# Altium PCB NB-Fi-Router.PcbDoc
Units mm, origin at the board's own origin, x right, y up, seen from the top; angles counter-clockwise.
Board outline 39 x 72 mm, 2 copper layers (Top Layer, Bottom Layer); 58 components, 51 nets, 236 pads, 135 vias.
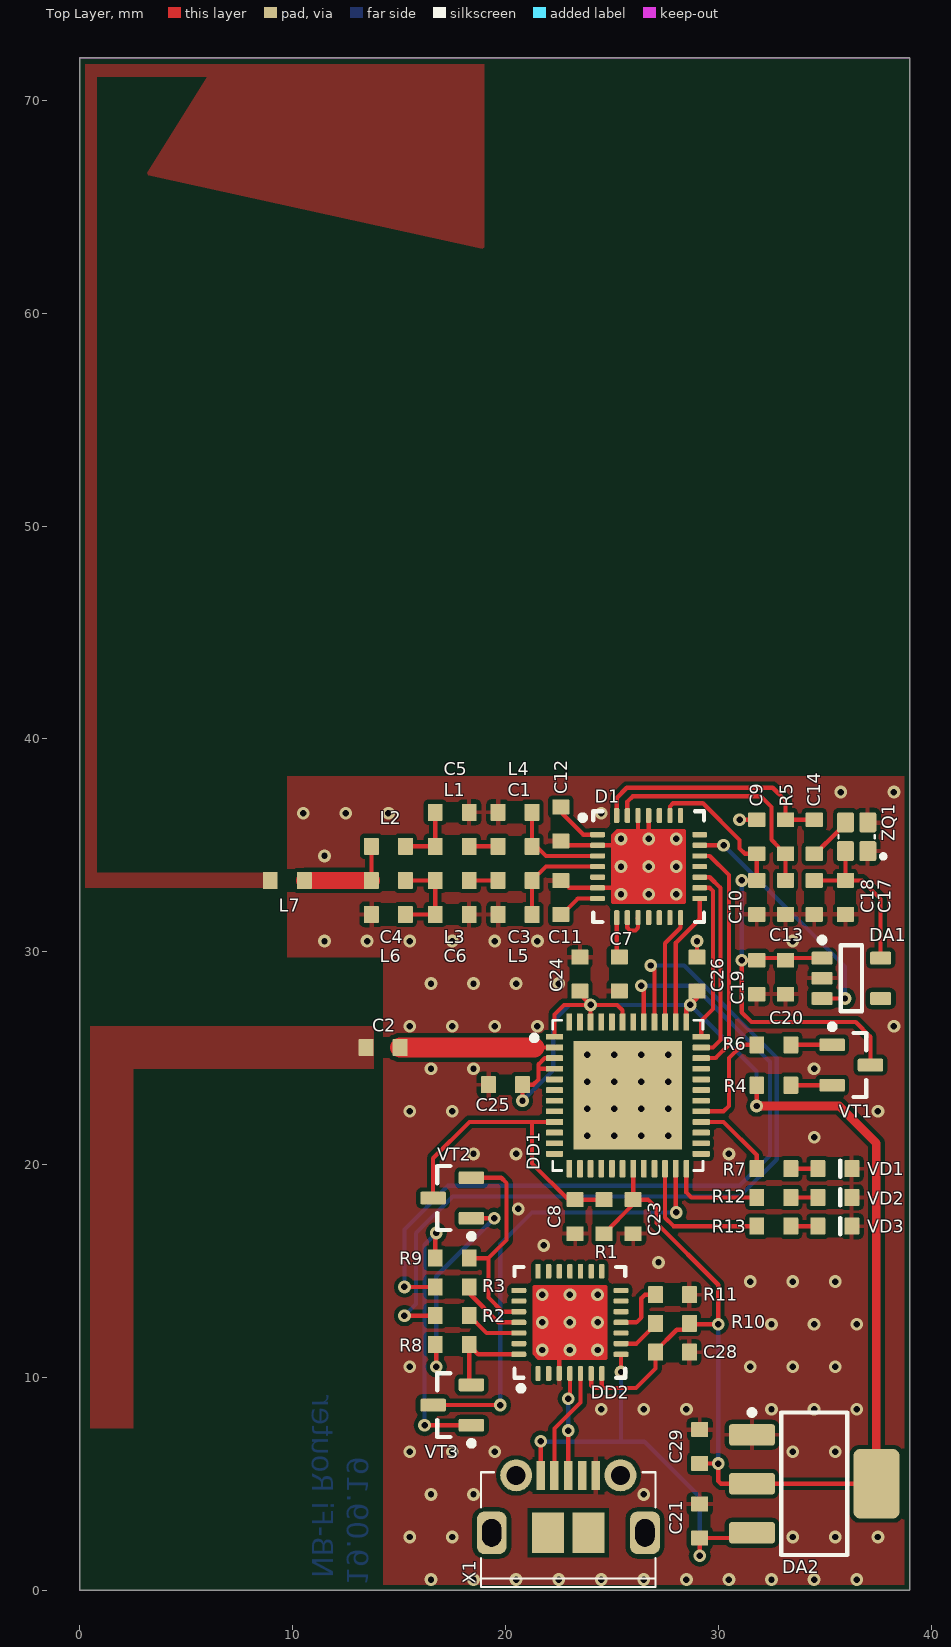
[diagram p0: Top Layer view]
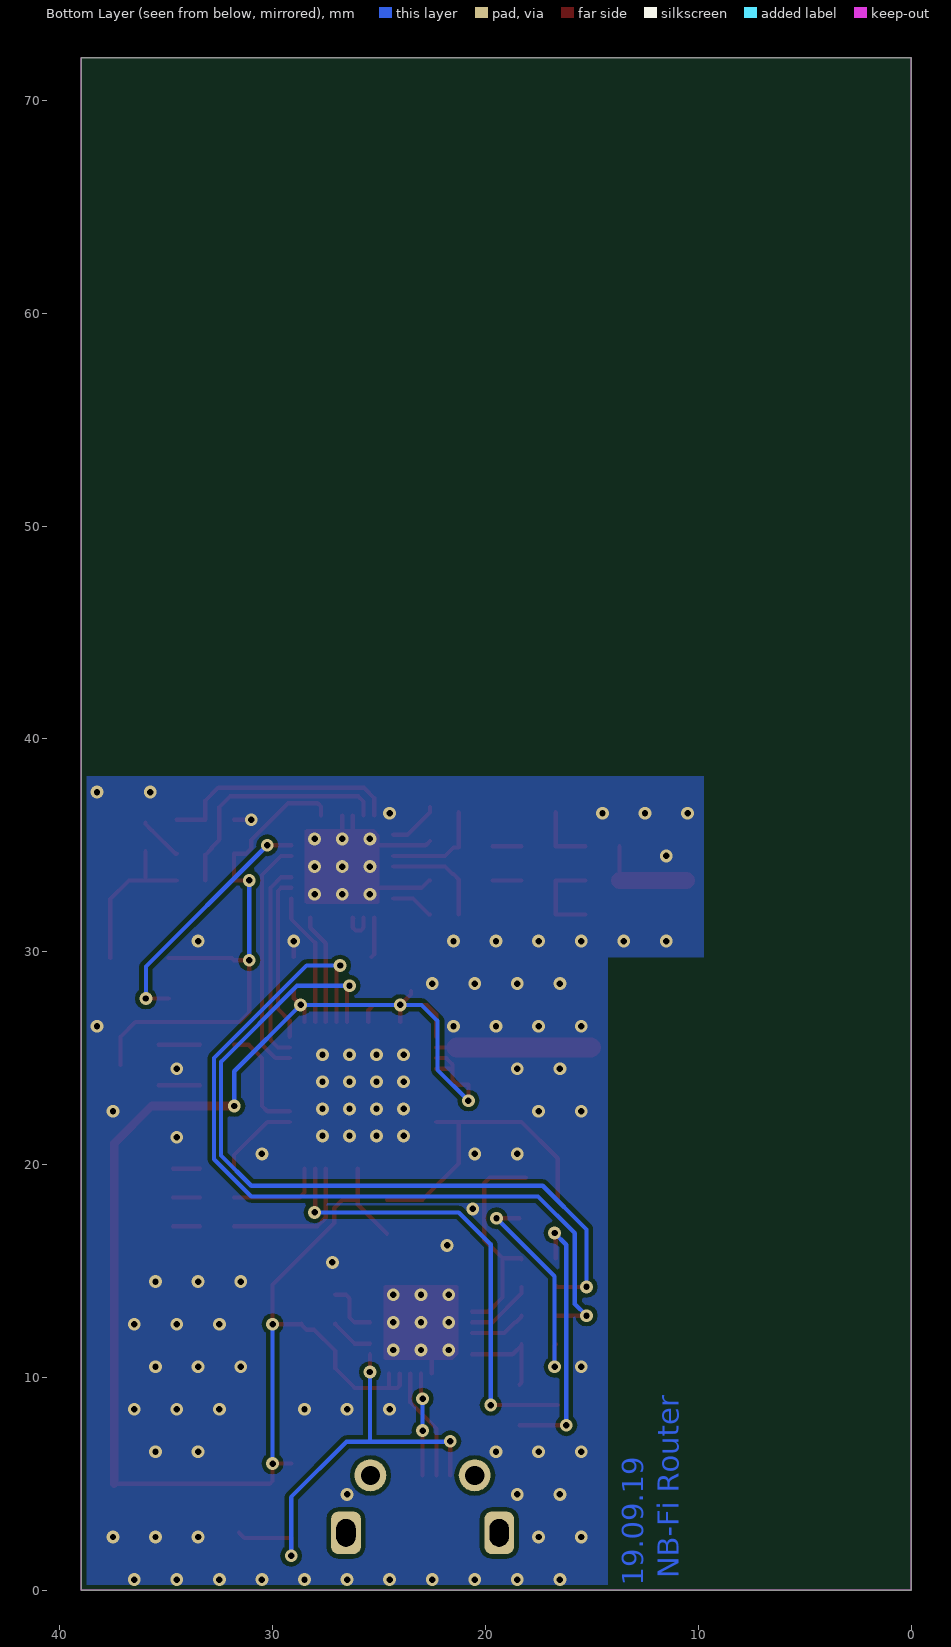
[diagram p1: Bottom Layer view, seen from below]
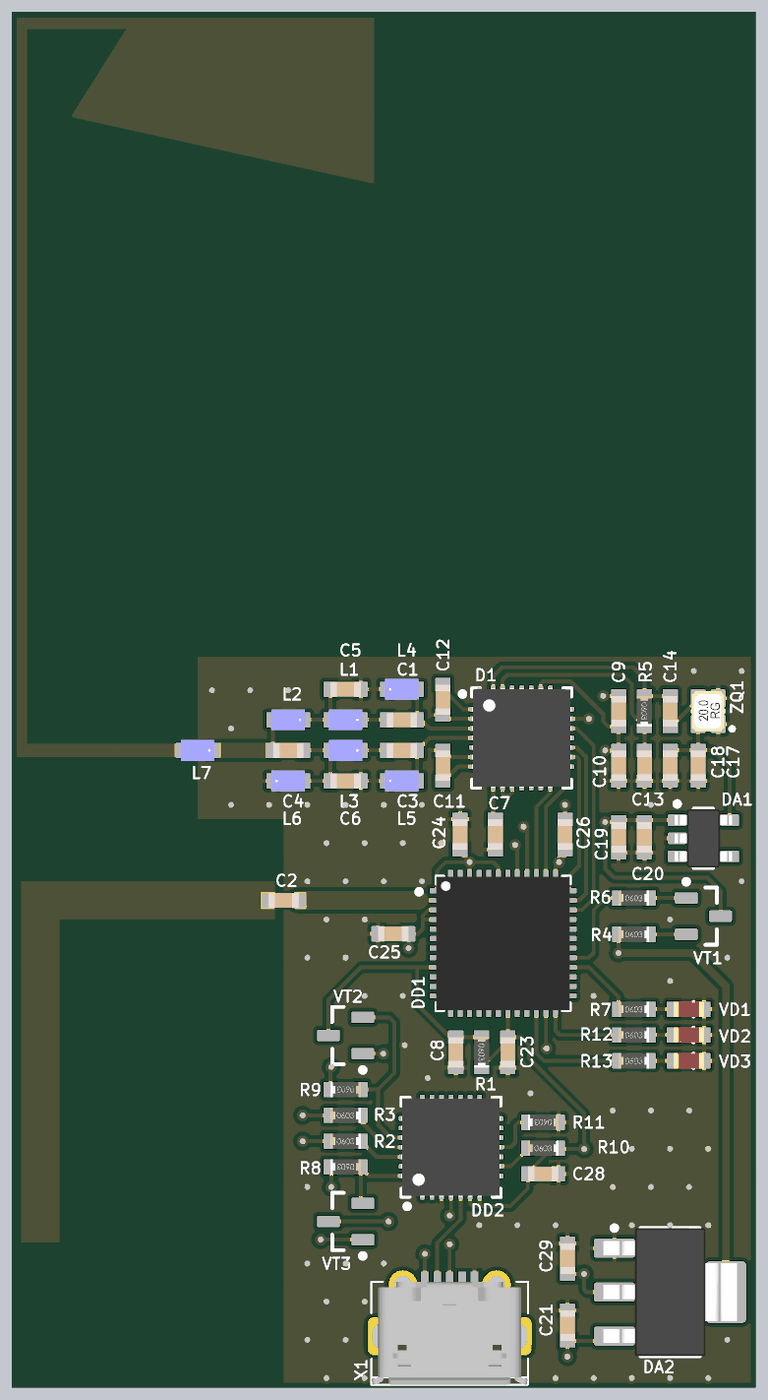
[diagram p2: 3D render of the assembled board from above, using the file's embedded part models]

## Layer stack, top to bottom
Top Solder: solder mask 0.0102, Solder Resist, Dk 3.5
Top Layer: signal copper 0.0356
Dielectric 1: dielectric 0.32, FR-4, Dk 4.8
Bottom Layer: signal copper 0.0356
Bottom Solder: solder mask 0.0102, Solder Resist, Dk 3.5

## Board outline
0,0 0,72 39,72 39,0

## Design rules (kind name [scope] priority, off if disabled: settings)
Clearance Clearance_SolderBridge [InComponent('SB1')] p1: gap=0.125 ignorepadtopadclearanceinfootprint=TRUE except(3: SMDPad-Fill SMDPad-Poly THPad-Fill THPad-Poly THPad-Region Via-Fill Via-Poly Via-Region Fill-Fill Fill-Poly Fill-Region Poly-Poly Poly-Region)
Clearance Clearance_Bat+ [InComponent('GB1')] p2: gap=0.125 ignorepadtopadclearanceinfootprint=TRUE except(3: Arc-Fill Arc-Poly Arc-Region Track-Fill Track-Poly Track-Region SMDPad-Fill SMDPad-Poly SMDPad-Region THPad-Fill THPad-Poly THPad-Region Via-Fill Via-Poly Via-Region Fill-Fill Fill-Poly Fill-Region Poly-Poly Poly-Region Region-Region)
Clearance Keepout [IsKeepOut] p3: gap=0.125 ignorepadtopadclearanceinfootprint=FALSE except(0.25: Arc-Fill Arc-Poly Arc-Region Track-Fill Track-Poly Track-Region SMDPad-Fill SMDPad-Poly SMDPad-Region THPad-Fill THPad-Poly THPad-Region Via-Fill Via-Poly Via-Region Fill-Fill Fill-Poly Fill-Region Poly-Poly Poly-Region Region-Region)
Clearance [All] p4: gap=0.125 ignorepadtopadclearanceinfootprint=FALSE except(0.2: Arc-Fill Arc-Poly Arc-Region Track-Fill Track-Poly Track-Region SMDPad-Fill SMDPad-Poly SMDPad-Region THPad-Fill THPad-Poly THPad-Region Via-Fill Via-Poly Via-Region Fill-Fill Fill-Poly Fill-Region Poly-Poly Poly-Region Region-Region)
ComponentClearance [All] p1: gap=0.2 collisioncheckmode=3 verticalgap=0.2 showdistances=FALSE
DiffPairsRouting [All] p1: maxlimit=0.254 minlimit=0.254 mostfreqgap=0.254 toplayer_minwidth=0.25 toplayer_maxwidth=0.381 toplayer_prefwidth=0.381 bottomlayer_minwidth=0.25 bottomlayer_maxwidth=0.381 bottomlayer_prefwidth=0.381 maxuncoupledlength=12.7
Height [All] p1: minheight=0 maxheight=35 prefheight=12.7
HoleSize [All] p1: absolutevalues=TRUE maxlimit=5 minlimit=0.3 maxpercent=80.000 minpercent=20.000
MinimumSolderMaskSliver [All] p1: minsoldermaskwidth=0.1
PolygonConnect PolygonConnectDirect [All vs InNet('ANT_PCB_2400') or InNet('ANT_PCB_868')] p1: connectstyle=Direct reliefconductorwidth=0.25 reliefentries=4 polygonreliefangle="90 Angle" airgapwidth=0.25
PolygonConnect PolygonConnectRelief [All] p2: thpad.connectstyle=Relief thpad.reliefconductorwidth=0.2 thpad.reliefentries=4 thpad.polygonreliefangle="90 Angle" thpad.airgapwidth=0.2 smdpad.connectstyle=Relief smdpad.reliefconductorwidth=0.2 smdpad.reliefentries=4 smdpad.polygonreliefangle="90 Angle" smdpad.airgapwidth=0.2 via.connectstyle=Direct via.reliefconductorwidth=0.254 via.reliefentries=4 via.polygonreliefangle="90 Angle" via.airgapwidth=0.254
RoutingVias [All] p1: holewidth=0.3 width=0.6 viastyle="Through Hole" minholewidth=0.3 minwidth=0.6 maxholewidth=0.4 maxwidth=0.8
SilkToSilkClearance [All] p1: silktosilkclearance=0.01
SilkToSolderMaskClearance [IsPad] p1: minsilkscreentomaskgap=0.01 clearancetoexposedcopper=TRUE
SolderMaskExpansion [All] p1: expansion=0.05
Width [All] p1: maxlimit=3 minlimit=0.125 preferedwidth=0.2 minimp=50.000000 maximp=50.000000 favimp=50.000000
23 further rules are at their usual default settings.

## Components (designator, comment, footprint, x,y, rotation, side; value= is the part's Value field where it differs from the comment)
C1 "2.7p 50V" C0603 20.452,34.95 r180 top
C2 "1.3p 50V" C0603 14.25,25.5 r180 top
C3 "2.7p 50V" C0603 20.452,33.35 r180 top
C4 "2.7p 50V" C0603 14.5,33.35 r180 top
C5 "6.2p 50V" C0603 17.5,36.55 r180 top
C6 "3.6p 50V" C0603 17.5,31.75 r180 top
C7 "39p 50V" C0603 25.35,28.95 r270 top
C8 "0.1u 16V" C0603 23.275,17.55 r90 top
C9 "0.1u 16V" C0603 31.807,35.4 r270 top
C10 "4.7u 10V" C0603 31.807,32.55 r90 top
C11 "0.1u 16V" C0603 22.602,32.55 r270 top
C12 "0.1u 16V" C0603 22.602,36 r90 top
C13 "1000p 50V" C0603 33.157,32.55 r270 top
C14 "1000p 50V" C0603 34.508,35.4 r270 top
C17 "0.1u 16V" C0603 35.976,32.55 r90 top
C18 "1000p 50V" C0603 34.508,32.55 r270 top
C19 "1000p 50V" C0603 31.807,28.8 r270 top
C20 "1u 16V" C0603 33.157,28.8 r90 top
C21 "4.7u 10V" C0603 29.127,3.25 r270 top
C23 "0.01u 50V" C0603 26,17.55 r90 top
C24 "4.7u 10V" C0603 23.5,28.95 r270 top
C25 "0.1u 16V" C0603 20,23.75 r0 top
C26 "0.1u 16V" C0603 29,28.95 r270 top
C28 "0.1u 16V" C0603 27.85,11.184 r180 top
C29 "4.7u 10V" C0603 29.127,6.75 r270 top
D1 "AX5043-1-TA05" QFN28 26.727,34 r0 top locked
DA1 "AP2127K-1.8TRG1" SOT23-5 36.25,28.75 r270 top
DA2 "AMS1117-3.3" SOT223-4 34.508,5 r270 top
DD1 "ESP32-PICO-D4" QFN48-7x7 25.75,23.25 r0 top locked
DD2 "CP2102-GMR" QFN28 23.027,12.584 r90 top
L1 "18nH" L0603_LQW 17.5,34.95 r180 top
L2 "12nH" L0603_LQW 14.5,34.95 r180 top
L3 "18nH" L0603_LQW 17.5,33.35 r180 top
L4 "18nH" L0603_LQW 20.452,36.55 r0 top
L5 "18nH" L0603_LQW 20.452,31.75 r0 top
L6 "12nH" L0603_LQW 14.5,31.75 r0 top
L7 "9.1nH" L0603_LQW 9.75,33.35 r180 top
R1 "10k 1%" R0603 24.625,17.55 r270 top
R2 "1k 1%" R0603 17.5,12.9 r0 top
R3 "1k 1%" R0603 17.5,14.251 r0 top
R4 "1R 1%" R0603 32.607,23.725 r0 top
R5 "1k 1%" R0603 33.157,35.4 r270 top
R6 "1k 1%" R0603 32.607,25.625 r0 top
R7 "200R 1%" R0603 32.607,19.805 r0 top
R8 "10k 1%" R0603 17.5,11.55 r180 top
R9 "10k 1%" R0603 17.5,15.601 r180 top
R10 "10k 1%" R0603 27.85,12.534 r0 top
R11 "10k 1%" R0603 27.85,13.884 r180 top
R12 "200R 1%" R0603 32.607,18.455 r0 top
R13 "200R 1%" R0603 32.607,17.105 r0 top
VD1 "RED" LED0603_RED 35.476,19.805 r0 top
VD2 "RED" LED0603_RED 35.476,18.455 r0 top
VD3 "RED" LED0603_RED 35.476,17.105 r0 top
VT1 "IRLML2246TRPBF" SOT23-3L 36.25,24.675 r270 top
VT2 "BC847BLT1G" SOT23-3L 17.5,18.426 r90 top
VT3 "BC847BLT1G" SOT23-3L 17.5,8.697 r90 top
X1 "1050170001" 1050170001 22.953,0.144 r0 top
ZQ1 "26MHz 2ppm" QSMD2.0x1.6x0.7 36.5,35.4 r90 top

## Footprints (in the part's own frame and the unit in brackets; to place one, negate y for a bottom-side part, rotate by r counter-clockwise, add the part's x,y. Pads: shape width x height; smd on the part's side, far side on the other; paste and mask are expansions set on the pad)
1050170001 [mm] "http://www.molex.com/pdm_docs/sd/1050170001_sd.pdf"
  rect 0.4x1.35 smd: 1(-1.3,5.25) 2(-0.65,5.25) 3(0,5.25) 4(0.65,5.25) 5(1.3,5.25)
  round 1.5 hole 0.9: 6(2.45,5.25) 11(-2.45,5.25)
  rrect50% 1.4x2 hole 0.9 slot 1.3 at 90 deg: 7(3.6,2.55) 10(-3.6,2.55)
  rect 1.5x1.9 smd: 8(0.95,2.55) 9(-0.95,2.55)
  silkscreen extent -4.1,0 4.1,5.4, body extent -4.3,0 4.1,7.62, height 7.1
C0603 [mm] "Chip Capacitor 0603"
  rrect10% 0.7x0.8 smd: 1(-0.8,0) 2(0.8,0)
  Top Layer pour cut-out: -0.4,0.5 0.4,0.5 0.4,-0.5 -0.4,-0.5
  body extent -0.8,-0.4 0.8,0.4, height 0.8
L0603_LQW [mm] "Chip Inductor 0603"
  rrect10% 0.7x0.8 smd: 1(-0.8,0) 2(0.8,0)
  Top Layer pour cut-out: -0.35,0.55 0.35,0.55 0.35,-0.55 -0.35,-0.55
  body extent -0.87,-0.54 0.88,0.55, height 0.93
LED0603_RED [mm]
  rrect10% 0.7x0.8 smd mask+0.075: 1(-0.8,0) 2(0.8,0)
  Top Layer pour cut-out: -0.35,0.55 0.35,0.55 0.35,-0.55 -0.35,-0.55
  silkscreen extent 0.25,-0.38 0.25,0.38, body extent -0.8,-0.4 0.8,0.4, height 0.39
QFN28 [mm] "QFN, 28-Leads, Body 5,00x5,00mm, Pitch 0,50mm, Thermal Pad 3,13x3,13mm, IPC Medium Density"
  rrect50% 0.7x0.25 smd: 1(-2.4,1.5) 2(-2.4,1) 3(-2.4,0.5) 4(-2.4,0) 5(-2.4,-0.5) 6(-2.4,-1) 7(-2.4,-1.5) 15(2.4,-1.5) 16(2.4,-1) 17(2.4,-0.5) 18(2.4,0) 19(2.4,0.5) 20(2.4,1) 21(2.4,1.5)
  rrect50% 0.25x0.7 smd: 8(-1.5,-2.4) 9(-1,-2.4) 10(-0.5,-2.4) 11(0,-2.4) 12(0.5,-2.4) 13(1,-2.4) 14(1.5,-2.4) 22(1.5,2.4) 23(1,2.4) 24(0.5,2.4) 25(0,2.4) 26(-0.5,2.4) 27(-1,2.4) 28(-1.5,2.4)
  round 0.6 hole 0.3: 29(0,0)
  Top Layer pour cut-out: -1.875,1.875 -1.875,-1.875 1.875,-1.875 1.875,1.875
  Top Layer region: -1.75,1.5 -1.5,1.75 1.7,1.75 1.75,1.7 1.75,-1.7 1.7,-1.75 -1.7,-1.75 -1.75,-1.7
  silkscreen extent -3.22,-2.6 2.6,2.6, body extent -2.6,-2.6 2.6,2.6, height 1
QFN48-7x7 [mm]
  rrect25% 0.81x0.27 smd: 1(-3.445,2.75) 2(-3.445,2.25) 3(-3.445,1.75) 4(-3.445,1.25) 5(-3.445,0.75) 6(-3.445,0.25) 7(-3.445,-0.25) 8(-3.445,-0.75) 9(-3.445,-1.25) 10(-3.445,-1.75) 11(-3.445,-2.25) 12(-3.445,-2.75) 25(3.445,-2.75) 26(3.445,-2.25) 27(3.445,-1.75) 28(3.445,-1.25) 29(3.445,-0.75) 30(3.445,-0.25) 31(3.445,0.25) 32(3.445,0.75) 33(3.445,1.25) 34(3.445,1.75) 35(3.445,2.25) 36(3.445,2.75)
  rrect25% 0.27x0.81 smd: 13(-2.75,-3.445) 14(-2.25,-3.445) 15(-1.75,-3.445) 16(-1.25,-3.445) 17(-0.75,-3.445) 18(-0.25,-3.445) 19(0.25,-3.445) 20(0.75,-3.445) 21(1.25,-3.445) 22(1.75,-3.445) 23(2.25,-3.445) 24(2.75,-3.445) 37(2.75,3.445) 38(2.25,3.445) 39(1.75,3.445) 40(1.25,3.445) 41(0.75,3.445) 42(0.25,3.445) 43(-0.25,3.445) 44(-0.75,3.445) 45(-1.25,3.445) 46(-1.75,3.445) 47(-2.25,3.445) 48(-2.75,3.445)
  rect 5.1x5.1 smd: 49(0,0)
  Top Layer pour cut-out: 2.9,-2.9 -2.9,-2.9 -2.9,2.9 2.9,2.9
  silkscreen extent -4.45,-3.53 3.53,3.53, body extent -3.5,-3.5 3.5,3.5, height 1.11
QSMD2.0x1.6x0.7 [mm]
  rrect25% 0.95x0.8 smd: 1(-0.675,-0.525) 2(0.675,-0.525) 3(0.675,0.525) 4(-0.675,0.525)
  silkscreen extent -1.02,-1.35 0.08,0.85, body extent -1.05,-0.85 1.05,0.85, height 0.56
R0603 [mm] "Chip Resistor 0603"
  rrect10% 0.7x0.8 smd: 1(-0.8,0) 2(0.8,0)
  Top Layer pour cut-out: -0.35,0.55 0.35,0.55 0.35,-0.55 -0.35,-0.55
  body extent -0.8,-0.4 0.8,0.4, height 0.46
SOT23-3L [mm] "SOT23, 3-Leads, Body 2.9x1.3mm, Pitch 0.95mm, Lead Span 2.5mm, IPC High Density"
  rrect25% 0.6x1.2 smd: 1(-0.95,-0.9) 2(0.95,-0.9) 3(0,0.9)
  silkscreen extent -1.92,-1.02 1.5,0.7, body extent -1.45,-1.4 1.45,1.4, height 1.3
SOT23-5 [mm] "SOT23, 5-Leads, Body 2,90x2,80mm, Pitch 0,95mm, IPC Medium Density"
  rrect25% 0.6x1 smd: 1(-0.95,-1.375) 2(0,-1.375) 3(0.95,-1.375) 4(0.95,1.375) 5(-0.95,1.375)
  silkscreen extent -1.92,-1.5 1.55,0.5, body extent -1.53,-1.5 1.52,1.5, height 1.45
SOT223-4 [mm] "SOT223, 4-Leads, Body 6,50x7,00mm (avg), Pitch 2,30mm, IPC Medium Density"
  rrect25% 1x2.15 smd: 1(-2.3,-2.925) 2(0,-2.925) 3(2.3,-2.925)
  rrect25% 3.25x2.15 smd: 4(0,2.925)
  silkscreen extent -3.47,-3.05 3.35,1.55, body extent -3.35,-3.5 3.35,3.5, height 1.8

## Part data
C1 C3 C4: library part CC0603BRNPO9BN2R7, "CERCAP 2.7p/50V 0603 BNPO", PartNumber=CC0603BRNPO9BN2R7
C2: library part CC0603BRNPO9BN1R3, "CAP CER 1.3PF 50V NPO 0603", PartNumber=CC0603BRNPO9BN1R3
C5: library part CC0603BRNPO9BN6R2, "CERCAP 6.2p/50V 0603 BNPO", PartNumber=CC0603BRNPO9BN6R2
C6: library part CC0603BRNPO9BN3R6, "CERCAP 3.6p/50V 0603 BNPO", PartNumber=CC0603BRNPO9BN3R6
C7: library part CC0603JRNPO9BN390, "CERCAP 39p/50V 0603 JNPO", PartNumber=CC0603JRNPO9BN390
C8 C9 C11 C12 C17 C25 C26 C28: library part CC0603KRX7R7BB104, "CERCAP 0.1/16V 0603 KX7R", PartNumber=CC0603KRX7R7BB104
C10 C24: library part C, "CERCAP 4.7/10V 0603 KX5R", PartNumber=CC0603KRX5R6BB475
C13 C14 C18 C19: library part CC0603JRNPO9BN102, "CERCAP 1000p/50V 0603 JNPO", PartNumber=CC0603JRNPO9BN102
C20: library part CC0603KRX7R7BB105, "CERCAP 1/16V 0603 KX7R", PartNumber=CC0603KRX7R7BB105
C21 C29: library part CC0603KRX5R6BB475, "CERCAP 4.7/10V 0603 KX5R", PartNumber=CC0603KRX5R6BB475
C23: library part CC0603KRX7R9BB103, "CAP CER 10000PF 50V X7R 0603", PartNumber=CC0603KRX7R9BB103
D1: "RF Transceiver RADIO TRANSCEIVER", PartNumber=AX5043-1-TA05
DA1: "LDO Voltage Regulators 1.8V 80mA CMOS LDO w/Enable", PartNumber=AP2127K-1.8TRG1
DA2: "1A LOW DROPOUT VOLTAGE REGULATOR", ComponentLink1Description=Datasheet, ComponentLink1URL=https://static.chipdip.ru/lib/552/DOC001552809.pdf, PartNumber=AMS1117-3.3
DD1: "The ESP32-PICO-D4 is a System-in-Package (SIP) module that is based on ESP32, providing complete Wi-Fi / and Bluetooth functionalities. The module has a size as small as 7.0±0.1 mm?7.0±0.1 mm?0.94±0.1 mm, thus requiring minimal PCB area. The module integrates a 4-MB SPI flash.", PartNumber=ESP32-PICO-D4
DD2: "IC USB-TO-UART BRIDGE 28VQFN", PartNumber=CP2102-GMR
L1 L3 L4 L5: library part LQW18AN18NG00D, "Fixed Inductors 0603 18nH 2%", PartNumber=LQW18AN18NG00D
L2 L6: library part LQW18AN12NJ00D, "Fixed Inductors 12 NH 5% (R)", PartNumber=LQW18AN12NJ00D
L7: library part LQW18AN9N1D00D, "9.1nH Unshielded Wirewound Inductor 650mA 110mOhm Max 0603 (1608 Metric)", PartNumber=LQW18AN9N1D00D
R1 R8 R9 R10 R11: library part RC0603FR-0710KL, "RES 0603 10K 1%", PartNumber=RC0603FR-0710KL
R2 R3 R5 R6: library part RC0603FR-071KL, "RES 0603 1K 1%", PartNumber=RC0603FR-071KL
R4: library part R, "RES 0603 1R 1%", PartNumber=RC0603FR-071RL
R7 R12 R13: library part RC0603FR-07200RL, "RES 0603 200R 1%", PartNumber=RC0603FR-07200RL
VD1 VD2 VD3: library part FYLS-0603URC, "LED Red 0603", PartNumber=FYLS-0603URC
VT1: "MOSFET MOSFT PCh -20V -2.6A 135mOhm -2.5V cpbl", PartNumber=IRLML2246TRPBF
VT2 VT3: "Bipolar (BJT) Transistor NPN 45V 100mA 100MHz 300mW Surface Mount SOT-23-3 (TO-236)", PartNumber=BC847BLT1G
X1: "USB - micro B USB 2.0 Receptacle Connector 5 Position Surface Mount, Right Angle; Through Hole", PartNumber=1050170001
ZQ1: library part NT2016SA-26.000000MHZ-NBG2, "TCXO Oscillator 4-pin", PartNumber=NT2016SA-26.000000MHZ-NBG2

## Via types
v1: diameter 0.6, hole 0.3, Top Layer to Bottom Layer, tented both sides, 103 vias
v2: diameter 0.6, hole 0.3, Top Layer to Bottom Layer, tented bottom, 32 vias

## Nets (pads, with @x,y where several pads share a name; then routed paths per layer and width w, separated by ;. In a path a pad name is that pad's centre, name@x,y a point inside that pad or via, vN(x,y) a via of type N, cw(c..) or ccw(c..) an arc to the next point about the centre after c; other vN are vias at no path point)
ANT_PCB_868: L7.2
ANT_PCB_2400: C2.2
AX_IRQ: D1.19 DD1.34 | length 11.3
  Top Layer w0.2: D1.19 29.6,34.5 30.5,33.6 30.5,25.625 29.875,25 DD1.34
AX_NPWR: DD1.29 R6.1 | length 5.2
  Top Layer w0.2: DD1.29 30.25,22.5 30.5,22.75 30.5,25 31.125,25.625 R6.1
AX_NSEL: D1.14 DD1.39 | length 5.2
  Top Layer w0.2: DD1.39 27.5,30.4 28.227,31.127 D1.14
AXVCC: C9.2 C10.2 C19.1 C20.2 D1.23 DA1.1 VT1.3 | length 25.6
  Top Layer w0.2: D1.23 27.727,36.827 27.875,36.975 29.275,36.975 31,35.25 31,34.85 31.25,34.6 C9.2 C10.2 v1@31.1,33.35 ; DA1.1 31.907,29.7 C19.1 31.1,29.6 31.1,27.15 31.555,26.695 36.455,26.695 37.15,26 VT1.3
  Bottom Layer w0.2: v1(31.1,29.6) v1(31.1,33.35)
DBG_RX: DD2.26 R2.2 | length 2.7
  Top Layer w0.2: R2.2 18.3,12.85 18.55,12.6 18.6,12.6 19.116,12.084 DD2.26
DBG_TX: DD2.25 R3.2 | length 3.2
  Top Layer w0.2: R3.2 18.3,13.95 19.666,12.584 DD2.25
DM: DD2.5 X1.2 | length 5.3
  Top Layer w0.2: X1.2 22.303,7.592 23.527,8.816 DD2.5
DP: DD2.4 X1.3 | length 4.9
  Top Layer w0.125: DD2.4@22.99,10.147 DD2.4
  Top Layer w0.2: X1.3 v1(22.953,7.5) ; v1(22.953,9) 23.027,9.074 DD2.4
  Bottom Layer w0.2: v1(22.953,7.5) v1(22.953,9)
DTR: DD2.28 R8.1 VT3.2 | length 4.4
  Top Layer w0.2: R8.1 R8.1@18.3,11.5 ; VT3.2 18.3,9.747 R8.1@18.3,11.5 ; DD2.28 18.716,11.084 R8.1@18.3,11.5
EN: C8.2 DD1.9 R1.1 VT2.3 | length 14.3
  Top Layer w0.2: VT2.3 16.6,20.295 18.305,22 21.25,22 ; DD1.9 21.25,22 ; R1.1 C8.2 22.952,18.35 21.25,20.052 21.25,22
GND: C5.1 C6.1 C7.2 C8.1 C9.1 C10.1 C11.1 C12.1 C13.2 C17.1 C18.2 C19.2 C20.1 C21.1 C23.1 C24.1 C25.1 C26.1 C28.1 C29.1 D1.2 D1.6 D1.25 D1.26 D1.29 DA1.2 DA2.1 DD1.49 DD2.3 DD2.29 L4.1 L5.1 L6.1 R11.1 VD1.2 VD2.2 VD3.2 X1.5 ZQ1.1 ZQ1.2 | length 9.8
  Top Layer w0.2: DD2.3 22.527,11 ; C11.1 22.652,33.35 23.002,33 D1.6 25.175,33 ; C12.1 22.802,35 D1.2 25.25,35 ; 26.227,35.473 D1.26 ; v2(26.727,35.3) D1.25 ; C26.1 v1(29,30.5) ; v1(31,36.2) C9.1
  other v1: 16.5,0.5 18.5,0.5 20.5,0.5 22.5,0.5 24.5,0.5 26.5,0.5 28.5,0.5 30.5,0.5 32.5,0.5 34.5,0.5 36.5,0.5 15.5,2.5 17.5,2.5 33.5,2.5 35.5,2.5 37.5,2.5 16.5,4.5 18.5,4.5 26.5,4.5 15.5,6.5 17.5,6.5 19.5,6.5 33.5,6.5 35.5,6.5 24.5,8.5 26.5,8.5 28.5,8.5 32.5,8.5 34.5,8.5 36.5,8.5 15.5,10.5 31.5,10.5 33.5,10.5 35.5,10.5 32.5,12.5 34.5,12.5 36.5,12.5 31.5,14.5 33.5,14.5 35.5,14.5 27.188,15.4 21.8,16.2 20.6,17.916 18.5,20.5 20.5,20.5 30.5,20.5 34.508,21.284 15.5,22.5 17.5,22.5 37.5,22.5 16.5,24.5 18.5,24.5 34.5,24.5 15.5,26.5 17.5,26.5 19.5,26.5 21.5,26.5 38.25,26.5 16.5,28.5 18.5,28.5 20.5,28.5 22.5,28.5 11.5,30.5 13.5,30.5 15.5,30.5 17.5,30.5 19.5,30.5 21.5,30.5 33.5,30.5 11.5,34.5 10.5,36.5 12.5,36.5 14.5,36.5 24.5,36.5 35.75,37.5 38.25,37.5
  other v2: 21.727,11.284 23.027,11.284 24.327,11.284 21.727,12.584 24.327,12.584 21.727,13.884 23.027,13.884 24.327,13.884 23.845,21.345 25.115,21.345 26.385,21.345 27.655,21.345 23.845,22.615 25.115,22.615 26.385,22.615 27.655,22.615 23.845,23.885 25.115,23.885 26.385,23.885 27.655,23.885 23.845,25.155 25.115,25.155 26.385,25.155 27.655,25.155 25.427,32.7 26.727,32.7 28.027,32.7 25.427,34 28.027,34 25.427,35.3 28.027,35.3
GPIO0: DD1.23 VT3.3 | length 21.6
  Top Layer w0.2: VT3.3 v1(19.75,8.697) ; DD1.23 28,17.777 v1(28.027,17.75)
  Bottom Layer w0.2: v1@19.75,8.75 19.75,16.25 21.25,17.75 v1(28.027,17.75)
LED_RED0: DD1.28 R7.1 | length 3.9
  Top Layer w0.2: DD1.28 30.25,22 31.807,20.443 R7.1
LED_RED1: DD1.24 R12.1 | length 4.5
  Top Layer w0.2: DD1.24 28.5,18.684 28.729,18.455 R12.1
LED_RED2: DD1.22 R13.1 | length 6.8
  Top Layer w0.2: DD1.22 27.5,17.5 27.895,17.105 R13.1
MCU_MISO: D1.16 DD1.36 | length 7.8
  Top Layer w0.2: D1.16 29.6,33 29.75,32.85 29.75,27.305 29.195,26.75 DD1.36
MCU_MOSI: D1.17 DD1.35 | length 9.4
  Top Layer w0.2: D1.17 29.6,33.5 30.1,33 30.1,25.85 29.75,25.5 DD1.35
MCU_SCK: D1.15 DD1.38 | length 6.3
  Top Layer w0.2: DD1.38 28,30.415 29.127,31.542 D1.15
NetC1_1: C1.1 D1.3 L4.2 | length 4.9
  Top Layer w0.2: L4.2 C1.1 21.252,34.9 21.502,34.9 21.902,34.5 D1.3
NetC1_2: C1.2 L1.1 | length 1.4
  Top Layer w0.2: L1.1 C1.2
NetC2_1: C2.1 DD1.2 | length 7.3
  Top Layer w0.2: 21.347,25.5 DD1.2
  Top Layer w0.96: C2.1 21.347,25.5
NetC3_1: C3.1 D1.4 L5.2 | length 5
  Top Layer w0.2: L5.2 C3.1 21.252,33.4 21.502,33.65 21.552,33.65 21.902,34 D1.4
NetC3_2: C3.2 L3.1 | length 1.4
  Top Layer w0.2: L3.1 C3.2
NetC4_1: C4.1 C6.2 L3.2 L6.2 | length 4.4
  Top Layer w0.2: L6.2 C6.2 L3.2 C4.1
NetC4_2: C4.2 L2.2 L7.1 | length 4.8
  Top Layer w0.2: C4.2 L2.2
  Top Layer w0.8: L7.1 C4.2
NetC5_2: C5.2 L1.2 L2.1 | length 3
  Top Layer w0.2: L2.1 L1.2 C5.2
NetC7_1: C7.1 D1.8 | length 1.9
  Top Layer w0.2: D1.8 25.227,29.873 C7.1
NetC11_2: C11.2 D1.7 | length 2
  Top Layer w0.2: C11.2 22.652,31.75 23.402,32.5 D1.7
NetC12_2: C12.2 D1.1 | length 2.4
  Top Layer w0.2: C12.2 22.602,36.55 23.652,35.5 D1.1
NetC13_1: C13.1 D1.27 R5.2 | length 11.5
  Top Layer w0.2: D1.27 25.727,37.05 25.977,37.3 32,37.3 32.5,36.8 32.5,35.258 32.857,34.9 32.857,34.85 33.157,34.55 C13.1
NetC14_1: C14.1 D1.28 R5.1 | length 11.5
  Top Layer w0.2: D1.28 25.227,37.227 25.7,37.7 32.557,37.7 33.157,37.1 R5.1 C14.1
NetC14_2: C14.2 ZQ1.3 | length 2.1
  Top Layer w0.2: C14.2 34.558,34.6 35.658,35.7 35.675,35.7 35.975,36 ZQ1.3
NetC17_2: C17.2 C18.1 DA1.5 ZQ1.4 | length 7.6
  Top Layer w0.2: C18.1 C17.2 ; ZQ1.4 C17.2 ; DA1.5 37.625,32.475 36.75,33.35 C17.2
NetD1_9: D1.9 D1.10 | length 1.6
  Top Layer w0.2: D1.9 25.727,31.123 25.85,31 26.104,31 26.227,31.123 D1.10 D1.10@26.202,31.575
NetDD1_40: DD1.40 R2.1 | length 39.1
  Top Layer w0.2: v1(15.251,12.9) R2.1 ; v1(26.827,29.35) 27,29.177 DD1.40
  Bottom Layer w0.2: v1(15.251,12.9) 15.8,13.45 15.8,16.776 17.524,18.5 31,18.5 32.75,20.25 32.75,25 28.4,29.35 v1(26.827,29.35)
NetDD1_41: DD1.41 R3.1 | length 36.5
  Top Layer w0.2: v1(15.251,14.251) R3.1 R3.1@16.7,14.301 ; v1(26.385,28.4) 26.5,28.285 DD1.41
  Bottom Layer w0.2: v1(15.251,14.251) 15.251,16.947 17.304,19 31,19 32.425,20.425 32.425,24.825 28.85,28.4 v1(26.385,28.4)
NetDD2_9: DD2.9 R10.1 | length 2
  Top Layer w0.2: DD2.9 26.15,11.584 27.05,12.484 R10.1
NetDD2_11: DD2.11 R11.2 | length 2.7
  Top Layer w0.2: DD2.11 26.15,12.584 26.385,12.819 26.385,13.716 26.553,13.884 R11.2
NetR4_2: R4.2 VT1.2 | length 1.9
  Top Layer w0.2: R4.2 VT1.2
NetR6_2: R6.2 VT1.1 | length 1.9
  Top Layer w0.2: R6.2 VT1.1
NetR7_2: R7.2 VD1.1 | length 1.3
  Top Layer w0.2: R7.2 VD1.1
NetR8_2: R8.2 VT2.1 | length 10.3
  Top Layer w0.2: R8.2 16.75,11.5 v1(16.75,10.5) ; VT2.1 v1(19.476,17.476)
  Bottom Layer w0.2: v1(16.75,10.5) 16.75,14.75 v1(19.476,17.476)
NetR9_2: R9.2 VT3.1 | length 12.7
  Top Layer w0.2: v1@16.2,7.747 VT3.1 ; R9.2 16.7,16.735 v1(16.75,16.785)
  Bottom Layer w0.2: v1(16.2,7.75) 16.2,16.235 v1(16.75,16.785)
NetR12_2: R12.2 VD2.1 | length 1.3
  Top Layer w0.2: R12.2 VD2.1
NetR13_2: R13.2 VD3.1 | length 1.3
  Top Layer w0.2: R13.2 VD3.1
RTS: DD2.24 R9.1 VT2.2 | length 10.4
  Top Layer w0.2: VT2.2@18.1,19.376 VT2.2 19.8,19.376 20.052,19.125 20.052,16.452 19.201,15.601 ; R9.1@18.3,15.551 R9.1 19.201,15.601 ; DD2.24 19.866,13.084 19.201,13.75 19.201,15.601
TCXO_EN: D1.20 DA1.3 | length 11.8
  Top Layer w0.2: D1.20 v1(30.25,35) ; DA1.3 v1(35.95,27.8)
  Bottom Layer w0.2: v1(30.25,35) 35.95,29.3 v1(35.95,27.8)
USB_VBUS: C21.2 DA2.3 DD2.8 X1.1 | length 20.4
  Top Layer w0.2: X1.1 v1(21.653,7) ; v1(25.427,10.25) DD2.8 ; v1(29.127,1.623) C21.2 31.333,2.45 DA2.3
  Bottom Layer w0.2: v1(21.653,7) 21.678,6.975 25.427,6.975 ; v1(25.427,10.25) 25.427,6.975 ; v1(29.127,1.623) 29.127,4.373 26.525,6.975 25.427,6.975
VCC: C23.2 C24.2 C25.2 C26.2 C28.2 C29.2 DA2.2 DA2.4 DD1.1 DD1.3 DD1.4 DD1.19 DD1.37 DD1.43 DD1.46 DD2.6 DD2.7 R1.2 R4.1 R10.2 | length 89.2
  Top Layer w0.2: v1(20.8,23.002) C25.2 21.302,23.75 21.552,24 21.552,24.5 ; DD1.4 21.552,24.5 ; DD1.3 21.844,25 21.552,24.708 21.552,24.5 ; DD1.1 22.305,27.055 22.75,27.5 v1(24,27.5) ; C24.2 23.5,28 v1(24,27.5) ; DD1.46 v1(24,27.5) ; DD2.6 24.027,9.617 24.144,9.5 24.527,9.5 ; DD2.7 24.527,9.5 ; R1.2 26,18.125 C23.2 ; DD1.43 25.5,27.25 25.25,27.5 v1(24,27.5) ; DD1.19 C23.2 ; DD1.37 28.5,27.316 v1(28.684,27.5) 29,27.816 C26.2 ; C29.2 v1(30,5.95) 30,5.127 30.127,5 DA2.2 DA2.4 ; v1(31.8,22.75) 31.807,22.757 R4.1 ; 24.527,9.5 26.135,9.5 27.05,10.415 C28.2 27.05,11.233 28.05,12.234 28.4,12.234 28.65,12.484 R10.2 28.684,12.5 v1(30,12.5) 30,14.35 27.1,17.25 27.1,17.95 26.7,18.35 C23.2
  Top Layer w0.4: v1(31.8,22.75) 35.683,22.75 37.433,21 DA2.4
  Bottom Layer w0.2: v1(20.8,23.002) 20.802,23 22.25,24.448 22.25,26.75 23,27.5 v1(24,27.5) v1(28.684,27.5) 31.8,24.384 v1(31.8,22.75) ; v1(30,5.95) v1(30,12.5)
pads on no net: D1.5 D1.11 D1.12 D1.13 D1.18 D1.21 D1.22 D1.24 DA1.4 DD1.5 DD1.6 DD1.7 DD1.8 DD1.10 DD1.11 DD1.12 DD1.13 DD1.14 DD1.15 DD1.16 DD1.17 DD1.18 DD1.20 DD1.21 DD1.25 DD1.26 DD1.27 DD1.30 DD1.31 DD1.32 DD1.33 DD1.42 DD1.44 DD1.45 DD1.47 DD1.48 DD2.1 DD2.2 DD2.10 DD2.12 DD2.13 DD2.14 DD2.15 DD2.16 DD2.17 DD2.18 DD2.19 DD2.20 DD2.21 DD2.22 DD2.23 DD2.27 X1.4 X1.6 X1.7 X1.8 X1.9 X1.10 X1.11

## Polygon pours and split planes (outlines as drawn)
GND on Top Layer "GND_L01_P002" (solid, remove dead copper, pour order 2): 9.75,38.25 39,38.25 39,0 14.25,0 14.25,29.75 9.75,29.75
ANT_PCB_868 on Top Layer "Top Layer-ANT_PCB_868" (solid, pour order 1): 0.2,33 0.2,71.7 19,71.7 19,63 3.1,66.5 6,71.1 0.8,71.1 0.8,33.7 8.95,33.7 8.95,33
ANT_PCB_2400 on Top Layer "Top Layer-ANT_PCB_2400" (solid, pour order 0): 0.5,7.6 0.5,26.5 13.8,26.5 13.8,24.5 2.5,24.5 2.5,7.6
GND on Bottom Layer "GND_L02_P004" (solid, remove dead copper, pour order 4): 9.75,38.25 39,38.25 39,0 14.25,0 14.25,29.75 9.75,29.75

## Keep-outs
Keep-Out Layer:
  the board outline again, w0.01

## Other copper
Bottom Layer:
  text "NB-Fi Router" at 10.925,0.553 h1 r270
  text "19.09.19" at 12.575,0.203 h1 r270

## Silkscreen, mask and mechanical layers (free items; w line width, h text height)
Bottom Solder:
  region: 14.05,0.228 14.05,8.228 12.4,8.228 12.4,0.228
  region: 12.15,0.228 12.15,11.913 10.375,11.913 10.375,0.228
Mechanical 1:
  the board outline again, w0.013